# Altium PCB PCB1.PcbDoc
Units mm, origin at the board's own origin, x right, y up, seen from the top; angles counter-clockwise.
Board outline 18 x 10.5 mm, 6 copper layers (Top Layer 1, GND, sygnaly 2, VCC, GND 2, Bottom Layer 1), stack 0.815 mm thick; 18 components, 17 nets, 70 pads, 12 vias.
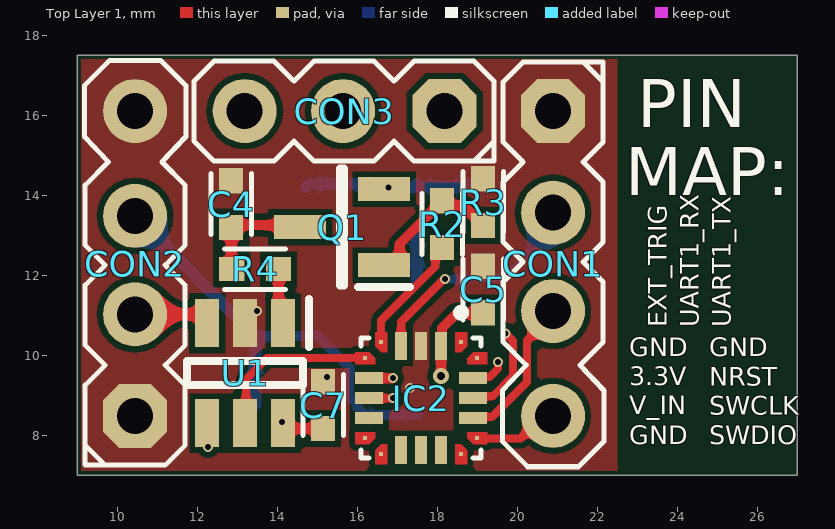
[diagram p0: Top Layer 1 view]
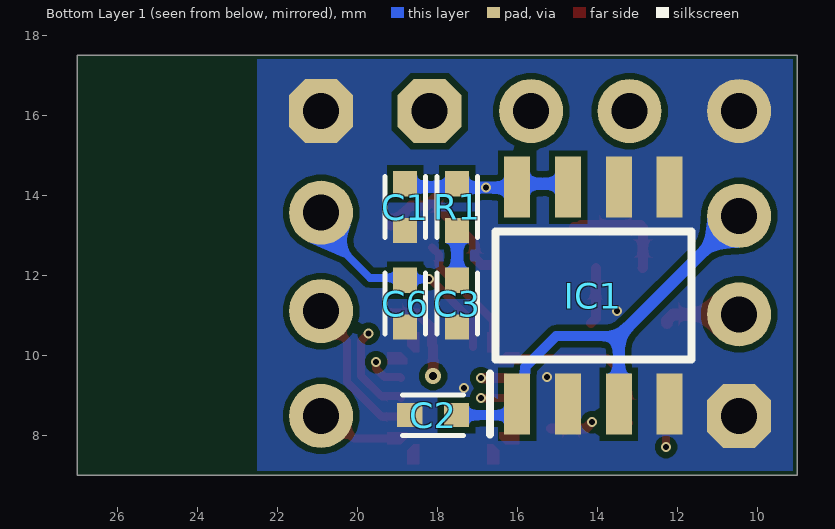
[diagram p1: Bottom Layer 1 view, seen from below]
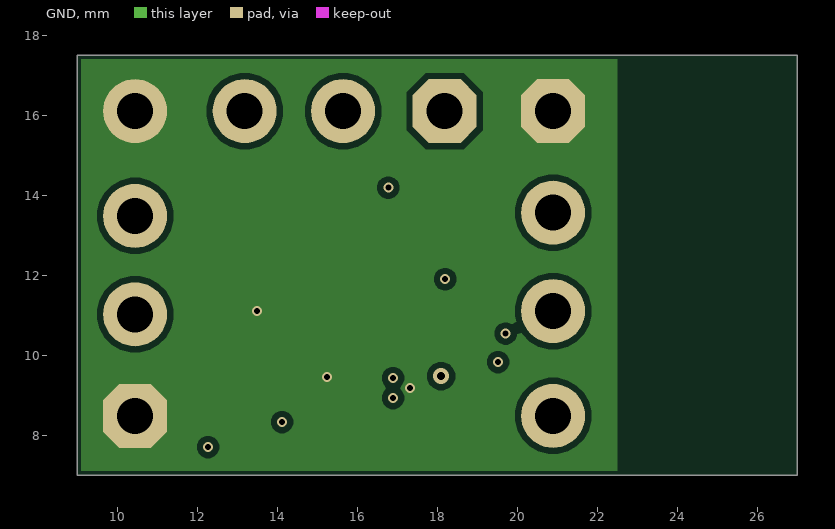
[diagram p2: GND]
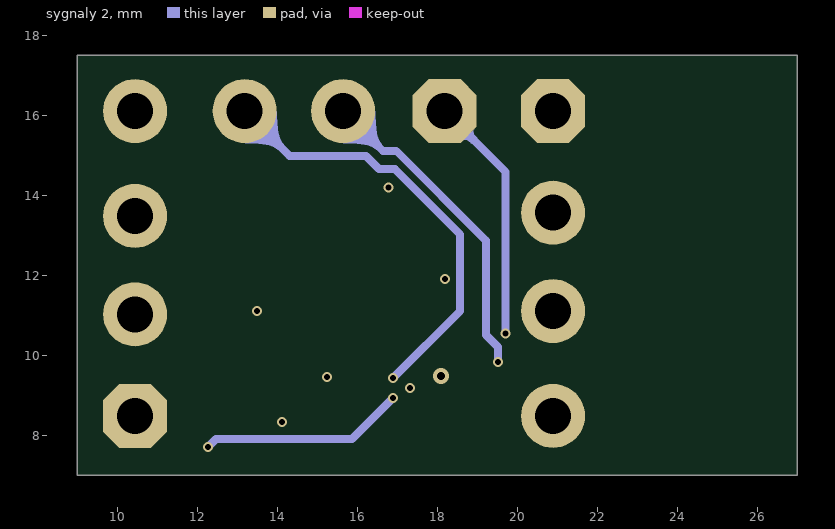
[diagram p3: sygnaly 2]
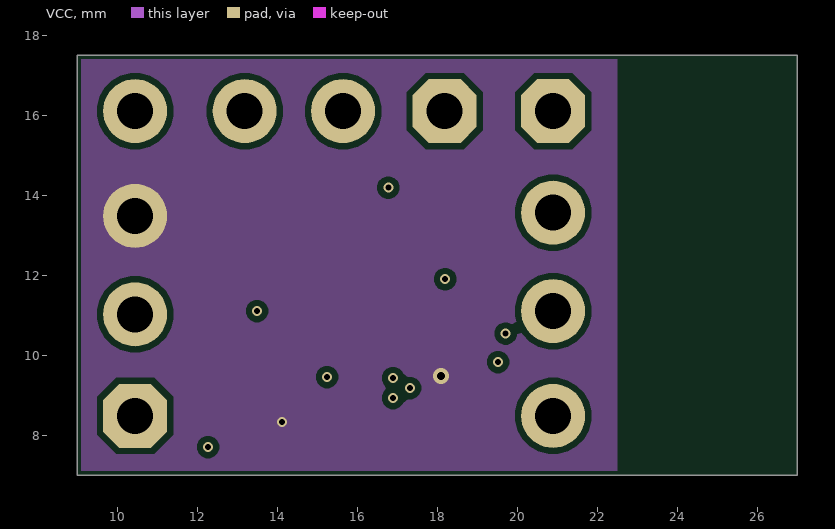
[diagram p4: VCC]
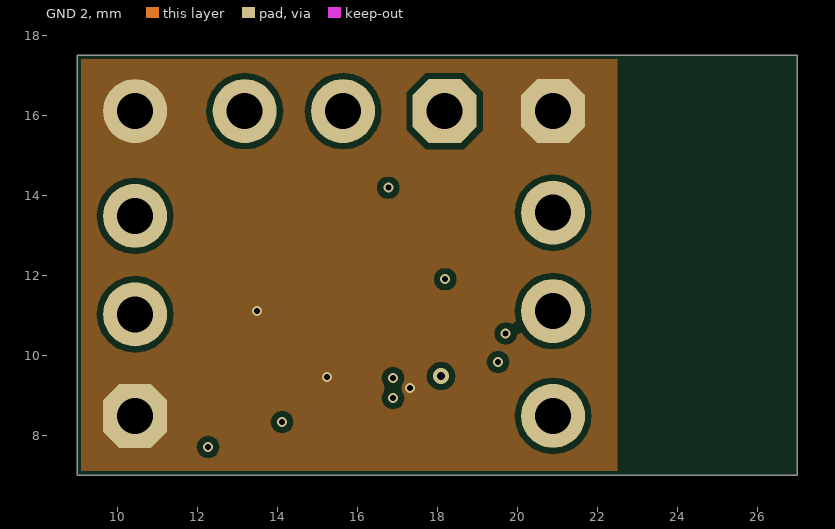
[diagram p5: GND 2]
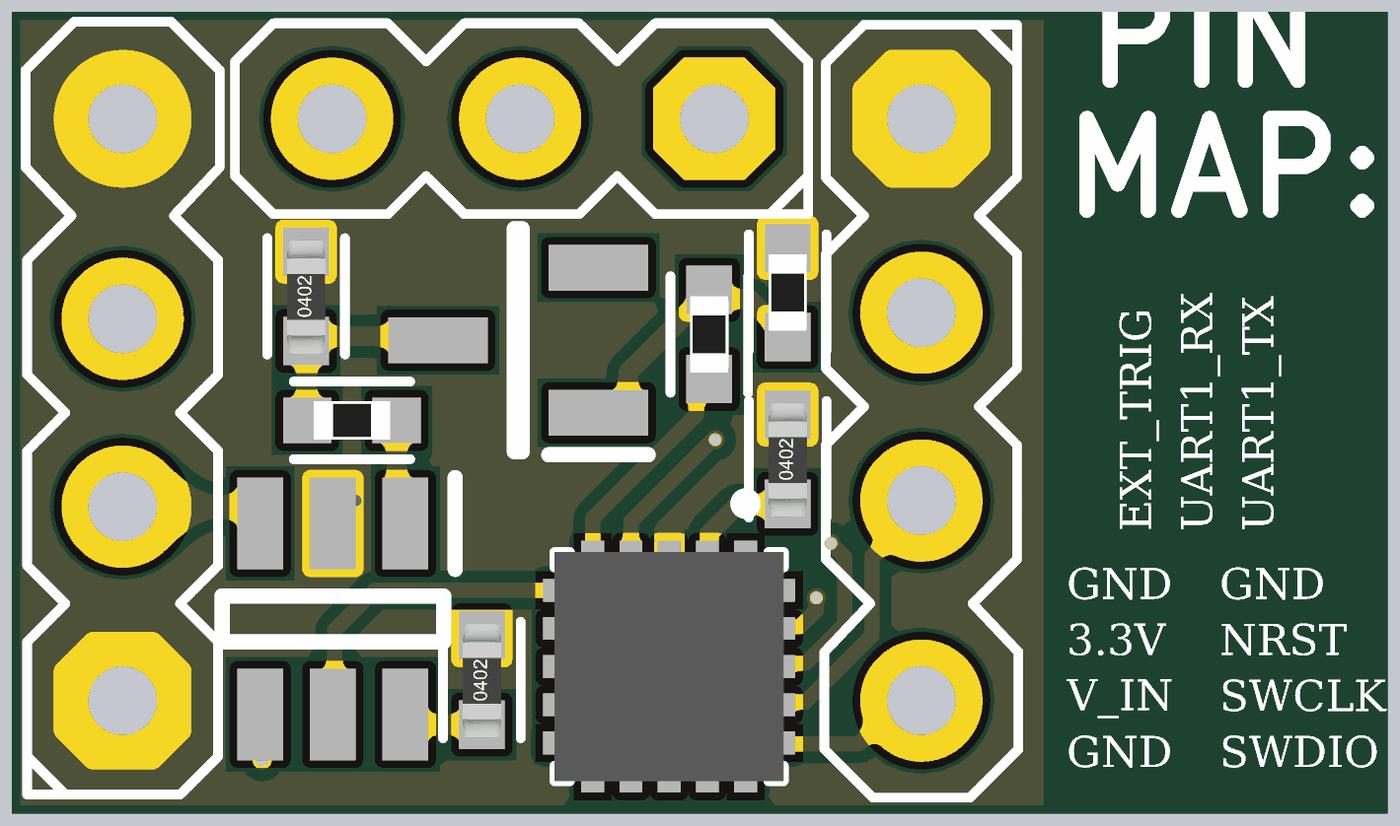
[diagram p6: 3D render of the assembled board from above, using the file's embedded part models]
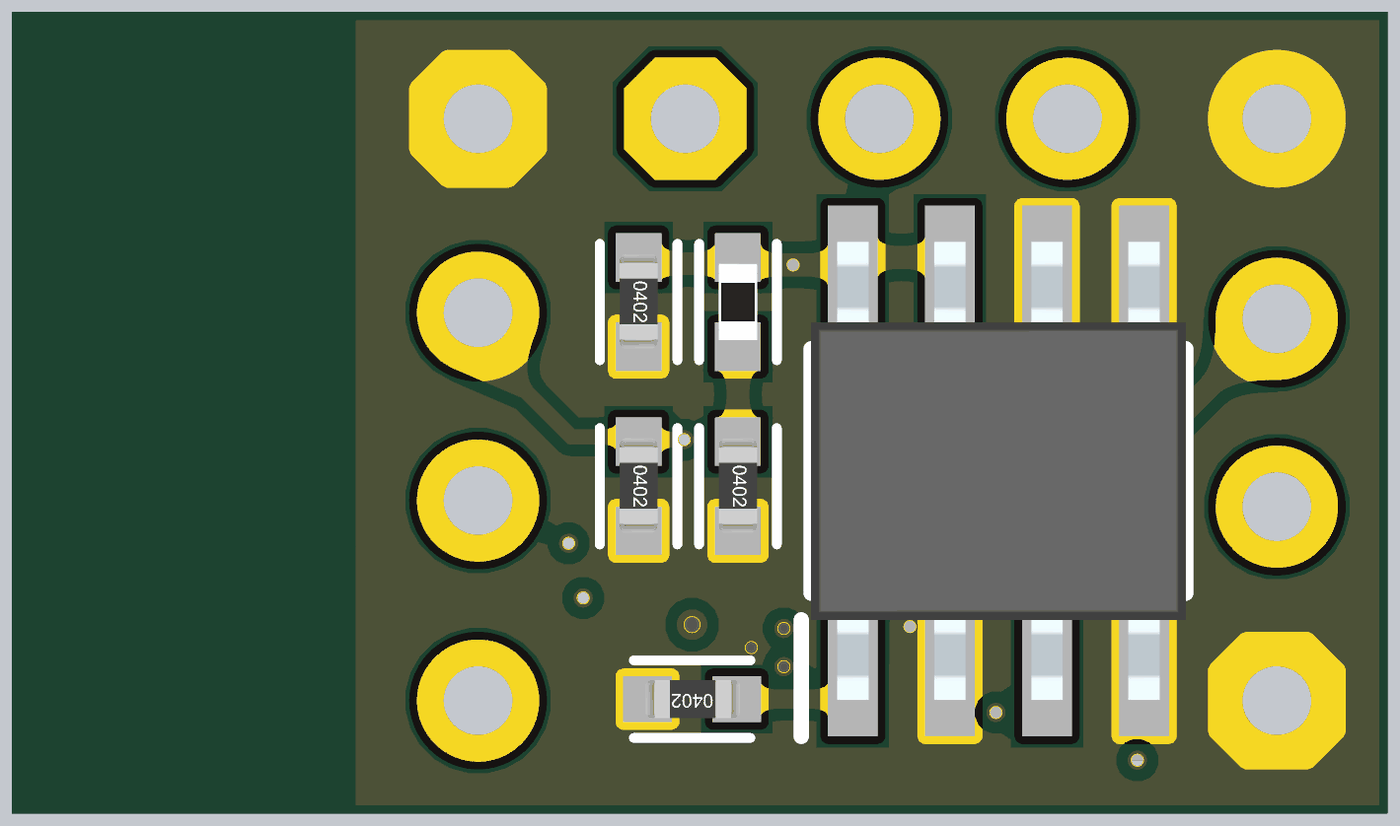
[diagram p7: 3D render of the assembled board from below, using the file's embedded part models]

## Layer stack, top to bottom
Top Solder: solder mask 0.0102, Solder Resist, Dk 3.5
Top Layer 1: signal copper 0.035
Dielectric 2: prepreg 0.0711, PP-006, Dk 4.1
GND: signal copper 0.035
Dielectric 3: prepreg 0.0711, PP-006, Dk 4.1
sygnaly 2: signal copper 0.035
Dielectric 1: dielectric 0.32, FR-4, Dk 4.8
VCC: signal copper 0.035
Dielectric 8: prepreg 0.0711, PP-006, Dk 4.1
GND 2: signal copper 0.035
Dielectric 9: prepreg 0.0711, PP-006, Dk 4.1
Bottom Layer 1: signal copper 0.035
Bottom Solder: solder mask 0.0102, Solder Resist, Dk 3.5

## Board outline
9,7 9,17.5 27,17.5 27,7

## Design rules (kind name [scope] priority, off if disabled: settings)
BoardOutlineClearance [All] p1: gap=0.3 ignorepadtopadclearanceinfootprint=FALSE except(0.1: Fill-OutlineEdge Poly-OutlineEdge)
Clearance [All] p1: gap=0.15 ignorepadtopadclearanceinfootprint=TRUE
ComponentClearance [All] p1: gap=-5 collisioncheckmode=3 verticalgap=-5 showdistances=FALSE
HoleSize [All] p1: absolutevalues=TRUE maxlimit=4 minlimit=0.02 maxpercent=80.000 minpercent=20.000
HoleToHoleClearance [All] p1: gap=0.127 allowstackedmicrovias=TRUE
PlaneClearance [All] p1: clearance=0.3
PlaneConnect [All] p1: planeconnectstyle=Direct reliefexpansion=0.508 reliefentries=4 reliefconductorwidth=0.254 reliefairgap=0.254
PolygonConnect "Polygon Power Connection" [(HasFootprint('DFN 5x6')) OR  (HasFootprint('R 2512')) OR  IsVia OR  HasFootprint('SMD PAD')  OR  (HasFootprint('DJNR60454R5FERROCORE'))  OR  (HasFootprint ('SON50P200X200X80-9N-D')) OR (HasFootprint('SOT230P700X180-4N'))  OR    InNetClass('Power')] p1: connectstyle=Direct reliefconductorwidth=0.254 reliefentries=4 polygonreliefangle="90 Angle" airgapwidth=0.254 // Conection to high power components
PolygonConnect [All] p2: connectstyle=Direct reliefconductorwidth=0.254 reliefentries=4 polygonreliefangle="90 Angle" airgapwidth=0.254
RoutingVias [All] p1: holewidth=0.3 width=0.5 viastyle="Through Hole" minholewidth=0.15 minwidth=0.25 maxholewidth=1 maxwidth=1.27
SilkToSilkClearance [All] p1: silktosilkclearance=0.127
SolderMaskExpansion "Tented Vias" [IsVia] p1: expansion=0.102 istentingtop=TRUE
SolderMaskExpansion [All] p2: expansion=0.102 istentingtop=FALSE
Width [All] p1: maxlimit=1 minlimit=0.127 preferedwidth=0.3 midlayer1_maxwidth=0.508 midlayer2_maxwidth=0.508 midlayer3_maxwidth=0.508 midlayer4_maxwidth=0.508 minimp=50.000000 maximp=50.000000 favimp=50.000000
24 further rules are at their usual default settings.

## Classes and differential pairs
component class Sheet1: C1 C2 C3 C4 C5 C6 C7 CON1 CON3 IC1 Q1 R1 R2 R3 R4 U1

## Components (designator, comment, footprint, x,y, rotation, side; value= is the part's Value field where it differs from the comment)
C1 "1nF" "C 0402" 18.8,13.7 r270 bottom
C2 "2.2uF" "C 0402" 18.1,8.5 r0 bottom
C3 "2.2uF" "C 0402" 17.5,11.287 r270 bottom
C4 "4.7uF" "C 0402" 12.85,13.775 r90 top
C5 "100nF" "C 0402" 19.15,11.641 r90 top
C6 "1nF" "C 0402" 18.8,11.287 r270 bottom
C7 "100nF" "C 0402" 15.15,8.75 r90 top
CON1 "4 PIN" "Goldpin 2.54 4P" 20.9,12.29 r270 top
CON2 "4 PIN" "Goldpin 2.54 4P" 10.45,12.29 r90 top
CON3 "3 Pin" "Goldpin 2.54 3P" 15.65,16.1 r180 top
IC1 "MCP1501-30E_SN" SOIC127P600X175-8N 14.092,11.488 r90 bottom
IC2 "STM32C011" 20-UFQFPN 17.6,8.925 r270 top
Q1 "IRLML6344TRPBF" SOT95P237X112-3N 15.625,13.2 r180 top
R1 "50R" "R 0402" 17.5,13.7 r90 bottom
R2 "47R" "R 0402" 18.125,13.275 r90 top
R3 "10k" "R 0402" 19.15,13.825 r270 top
R4 "10k" "R 0402" 13.45,12.15 r180 top
U1 "LMV761MFX_NOPB" SOT95P280X145-6N 13.2,9.55 r270 top

## Footprints (in the part's own frame and the unit in brackets; to place one, negate y for a bottom-side part, rotate by r counter-clockwise, add the part's x,y. Pads: shape width x height; smd on the part's side, far side on the other; paste and mask are expansions set on the pad)
20-UFQFPN [mm]
  rect 0.1x0.1 smd paste-1 mask+0: 1(-1.4,1) 5(-1.4,-1) 6(-1,-1.4) 10(1,-1.4) 11(1.4,-1) 15(1.4,1) 16(1,1.4) 20(-1,1.4)
  rect 0.7x0.3 smd: 2(-1.3,0.5) 3(-1.3,0) 4(-1.3,-0.5) 12(1.3,-0.5) 13(1.3,0) 14(1.3,0.5)
  rect 0.3x0.7 smd: 7(-0.5,-1.3) 8(0,-1.3) 9(0.5,-1.3) 17(0.5,1.3) 18(0,1.3) 19(-0.5,1.3)
  Top Layer 1 region: 1.65,-1.15 1.3,-1.15 1.15,-1 1.15,-0.85 1.65,-0.85
  Top Layer 1 region: -0.85,-1.65 -1.15,-1.65 -1.15,-1.3 -1,-1.15 -0.85,-1.15
  Top Layer 1 region: -1.15,1 -1.15,0.85 -1.65,0.85 -1.65,1.15 -1.3,1.15
  Top Layer 1 region: 1.15,1.3 1,1.15 0.85,1.15 0.85,1.65 1.15,1.65
  Top Layer 1 region: -0.85,1.15 -1,1.15 -1.15,1.3 -1.15,1.65 -0.85,1.65
  Top Layer 1 region: 1.15,-1.3 1.15,-1.65 0.85,-1.65 0.85,-1.15 1,-1.15
  Top Layer 1 region: 1.65,0.85 1.15,0.85 1.15,1 1.3,1.15 1.65,1.15
  Top Layer 1 region: -1.15,-1 -1.3,-1.15 -1.65,-1.15 -1.65,-0.85 -1.15,-0.85
  silkscreen extent -2.23,-1.5 1.5,1.5, body extent -1.5,-1.5 1.5,1.5, height 0.6
"C 0402" [mm] "MLCC Capacitor 0402"
  rect 0.635x0.6 smd: 1(-0.584,0) 2(0.584,0)
  silkscreen extent -0.76,-0.51 0.76,0.51, body extent -0.76,-0.25 0.74,0.25, height 0.35
"Goldpin 2.54 3P" [mm]
  oct 1.6x1.6 hole 0.9: 1(-2.54,0)
  round 1.6 hole 0.9: 2(0,0) 3(2.46,0)
  silkscreen extent -3.77,-1.25 3.73,1.25
"Goldpin 2.54 4P" [mm]
  oct 1.6x1.6 hole 0.9: 1(-3.81,0)
  round 1.6 hole 0.9: 2(-1.27,0) 3(1.19,0) 4(3.81,0)
  silkscreen extent -5.04,-1.27 5.08,1.27
"R 0402" [mm] "0402 resistor Chip"
  rect 0.635x0.6 smd: 1(-0.584,0) 2(0.584,0)
  silkscreen extent -0.76,-0.51 0.76,0.51, body extent -0.5,-0.25 0.5,0.25, height 0.31
SOIC127P600X175-8N [mm]
  rect 1.525x0.65 smd: 1(-2.712,1.905) 2(-2.712,0.635) 3(-2.712,-0.635) 4(-2.712,-1.905) 5(2.712,-1.905) 6(2.712,-0.635) 7(2.712,0.635) 8(2.712,1.905)
  silkscreen extent -3.47,-2.45 1.6,2.58, body extent -3,-2.45 3,2.45, height 1.75
SOT95P237X112-3N [mm]
  rect 1.3x0.6 smd: 1(-1.05,0.95) 2(-1.05,-0.95) 3(1.05,0)
  silkscreen extent -1.7,-1.46 0.05,1.5, body extent -1.18,-1.46 1.18,1.46, height 1.12
SOT95P280X145-6N [mm]
  rect 1.2x0.6 smd: 1(-1.25,0.95) 2(-1.25,0) 3(-1.25,-0.95) 4(1.25,-0.95) 5(1.25,0) 6(1.25,0.95)
  silkscreen extent -1.85,-1.45 0.3,1.6, body extent -1.4,-1.45 1.4,1.45, height 1.2

## Part data
C1 C2 C3 C4 C5 C6 C7: library part Capacitor, "MLCC Capacitor"
IC1: "Integrated Circuit", Arrow Part Number=MCP1501-30E/SN, Manufacturer_Name=Microchip, Mouser Part Number=579-MCP1501-30E/SN, Arrow Price/Stock=https://www.arrow.com/en/products/mcp1501-30esn/microchip-technology?utm_currency=USD&region=nac, Datasheet Link=http://ww1.microchip.com/downloads/en/DeviceDoc/20005474E.pdf, Height=1.75mm, Manufacturer_Part_Number=MCP1501-30E/SN, Mouser Price/Stock=https://www.mouser.co.uk/ProductDetail/Microchip-Technology/MCP1501-30E-SN?qs=BA62vJVifGo5%252B6Z65Dge2g%3D%3D
IC2: library part STM32C011F4U, "UFQFPN 20"
Q1: "MOSFET (N-Channel)", Manufacturer_Name=Infineon, Mouser Part Number=942-IRLML6344TRPBF, Arrow Part Number=IRLML6344TRPBF, Arrow Price/Stock=https://www.arrow.com/en/products/irlml6344trpbf/infineon-technologies-ag?utm_currency=USD&region=nac, Datasheet Link=https://www.infineon.com/dgdl/irlml6344pbf.pdf?fileId=5546d462533600a4015356689c44262c, Height=1.12mm, Manufacturer_Part_Number=IRLML6344TRPBF, Mouser Price/Stock=https://www.mouser.co.uk/ProductDetail/Infineon-Technologies/IRLML6344TRPBF?qs=9%252BKlkBgLFf2w4qS48UOXVw%3D%3D
R1 R2 R3 R4: library part Resistor, "General pourpouse resistor"
U1: "Undefined or Miscellaneous", Arrow Part Number=LMV761MFX/NOPB, Manufacturer_Name="Texas Instruments", Mouser Part Number=926-LMV761MFX/NOPB, Arrow Price/Stock=https://www.arrow.com/en/products/lmv761mfxnopb/texas-instruments?region=nac, Datasheet Link=http://www.ti.com/lit/gpn/lmv761, Height=1.45mm, Manufacturer_Part_Number=LMV761MFX/NOPB, Mouser Price/Stock=https://www.mouser.co.uk/ProductDetail/Texas-Instruments/LMV761MFX-NOPB?qs=7lkVKPoqpbaXVbo0E6mk2g%3D%3D

## Via types
v1: diameter 0.25, hole 0.15, Top Layer 1 to Bottom Layer 1, tented both sides, 7 vias
v2: diameter 0.25, hole 0.15, Top Layer 1 to Bottom Layer 1, tented bottom, 4 vias
v3: diameter 0.4, hole 0.2, Top Layer 1 to Bottom Layer 1, tented both sides, 1 vias

## Nets (pads, with @x,y where several pads share a name; then routed paths per layer and width w, separated by ;. In a path a pad name is that pad's centre, name@x,y a point inside that pad or via, vN(x,y) a via of type N, cw(c..) or ccw(c..) an arc to the next point about the centre after c; other vN are vias at no path point)
3.3V: C2.1 C5.1 C7.1 CON2.3 IC1.1 IC1.3 IC2.2 U1.6 | length 15.1
  Top Layer 1 w0.25: v2(14.125,8.325) 14.284,8.166 C7.1 ; v3(18.1,9.475) IC2.2 18.125,10.25 18.125,10.675 18.493,11.043 19.136,11.043 C5.1
  Top Layer 1 w0.5: CON2.3 CON2.3@10.748,13.48
  Bottom Layer 1 w0.25: 13.457,10.473 15.027,10.473 15.797,9.703 15.797,8.975 IC1.1 15.997,8.7 16.197,8.5 C2.1
  Bottom Layer 1 w0.3: CON2.3 13.457,10.473 IC1.3
3v_reference: C1.1 IC1.7 IC1.8 Q1.2 R1.2 | length 4.3
  Bottom Layer 1 w0.3: IC1.7 14.812,14.284 15.997,14.284 15.997,14.248 16.061,14.185 v2(16.778,14.185) 17.401,14.185 R1.2 17.581,14.203 18.719,14.203 C1.1
comparator_enable: IC2.6 U1.5 | length 4.3
  Top Layer 1 w0.2: U1.5 13.223,8.323 13.223,9.398 13.75,9.925 IC2.6
comparator_fb: IC2.8 U1.4 | length 6.3
  Top Layer 1 w0.2: U1.4 12.275,8.275 v1(12.275,7.7) ; IC2.8 v1(16.9,8.925)
  sygnaly 2 w0.2: v1(12.275,7.7) 12.475,7.9 15.875,7.9 v1(16.9,8.925)
external_trigger: CON3.3 IC2.7 | length 11.5
  Top Layer 1 w0.25: IC2.7 v1(16.9,9.425)
  sygnaly 2 w0.2: CON3.3 14.315,14.975 16.225,14.975 16.55,14.65 16.941,14.65 18.578,13.013 18.578,11.103 v1(16.9,9.425)
GND: C1.2 C2.2 C3.2 C4.2 C5.2 C6.2 C7.2 CON1.1 CON2.1 CON2.4 IC1.2 IC1.4 IC1.5 IC1.6 IC2.3 R3.1 U1.2
  other v1: 17.325,9.175
  other v2: 15.25,9.45 13.5,11.1
NetC3_1: C3.1 R1.1 | length 1.2
  Bottom Layer 1 w0.3: C3.1 R1.1
NetC4_1: C4.1 Q1.3 R4.2 | length 2.9
  Top Layer 1 w0.25: R4.2@12.866,12.175 12.858,12.183 12.858,13.183 C4.1 12.909,13.25 14.4,13.25 14.35,13.2 Q1.3
NetIC2_5: IC2.5 R2.1 | length 3
  Top Layer 1 w0.2: IC2.5 16.6,10.864 17.955,12.219 17.955,12.521 R2.1
NetQ1_1: Q1.1 R2.2 R3.2 | length 3.7
  Top Layer 1 w0.25: Q1.1 16.887,12.25 17.062,12.425 17.062,12.779 18.125,13.842 R2.2 ; R2.2@18.046,13.938 18.246,13.739 18.652,13.739 18.958,13.433 18.975,13.433 19.15,13.258 R3.2
NetR4_1: R4.1 U1.1 | length 1.4
  Top Layer 1 w0.25: R4.1@14.034,12.175 14.034,10.916 U1.1
NRST: C6.1 CON1.2 IC2.4 | length 5.8
  Top Layer 1 w0.2: IC2.4@17.1,10.2 17.1,10.832 18.156,11.888 18.193,11.888 v1(18.203,11.897)
  Bottom Layer 1 w0.2: v1(18.203,11.897) 18.781,11.897 C6.1@18.8,11.917 ; C6.1@18.8,11.934 19.684,11.934 20.632,12.882 20.632,13.292 CON1.2
SWCLK: CON1.3 IC2.17 | length 3.8
  Top Layer 1 w0.2: IC2.17 18.937,8.462 19.387,8.462 20.25,9.325 20.25,10.36 20.897,11.007 CON1.3@20.897,11.097
SWDIO: CON1.4 IC2.16 | length 2.1
  Top Layer 1 w0.2: IC2.16@18.986,7.914 20.083,7.914 20.649,8.48 CON1.4
UART_RX: CON3.2 IC2.19 | length 9
  Top Layer 1 w0.2: IC2.19 18.925,9.45 19.314,9.45 19.525,9.661 v1(19.525,9.825)
  GND 2 w0.2: CON3.2 CON3.2@15.918,15.832
  sygnaly 2 w0.2: CON3.2@15.918,15.832 16.641,15.109 16.977,15.109 19.225,12.861 19.225,10.5 19.525,10.2 v1(19.525,9.825)
UART_TX: CON3.1 IC2.18 | length 8.5
  Top Layer 1 w0.2: IC2.18 18.948,8.973 19.393,8.973 19.9,9.481 19.9,10.355 v1@19.725,10.531
  sygnaly 2 w0.2: CON3.1 19.715,14.575 v1@19.715,10.554
  other v1: 19.715,10.54
voltage_input: CON2.2 U1.3 | length 1.9
  Top Layer 1 w0.3: CON2.2 12.1,11.02 12.25,10.87 U1.3
pads on no net: IC2.1 IC2.9 IC2.10 IC2.11 IC2.12 IC2.13 IC2.14 IC2.15 IC2.20

## Polygon pours and split planes (outlines as drawn)
3.3V on VCC "3.3V_L04_P002" (solid, pour order 2): 9,17.5 9,7 22.5,7 22.5,17.5
3.3V on VCC "NONET_L-01_P-001" (solid, pour order 0): 9,7 22.5,7 22.5,17.5 9,17.5
GND on GND "GND_L02_P001" (solid, pour order 1): 9,17.5 9,7 22.5,7 22.5,17.5
GND on Top Layer 1 "GND_L01_P004" (solid, pour order 4): 9,17.5 9,7 22.5,7 22.5,17.5
GND on Bottom Layer 1 "GND_L06_P005" (solid, pour order 5): 9,17.5 9,7 22.5,7 22.5,17.5
GND on GND 2 "GND_L05_P006" (solid, pour order 6): 9,17.5 9,7 22.5,7 22.5,17.5

## Silkscreen, mask and mechanical layers (free items; w line width, h text height)
Top Overlay:
  text "PIN" at 23,15.7 h1.2
  text "MAP:" at 22.7,14 h1.2
  text "EXT_TRIG" at 23.904,10.7 h0.8 r90
  text "UART1_RX" at 24.704,10.7 h0.8 r90
  text "UART1_TX" at 25.504,10.7 h0.8 r90
  text "GND" at 22.8,9.81 h0.8
  text "GND" at 24.8,9.81 h0.8
  text "3.3V" at 22.8,9.078 h0.8
  text "NRST" at 24.8,9.077 h0.8
  text "V_IN" at 22.8,8.354 h0.8
  text "SWCLK" at 24.8,8.345 h0.8
  text "GND" at 22.8,7.61 h0.8
  text "SWDIO" at 24.8,7.61 h0.8